# EAGLE board simple_schematic_3v (EAGLE 7.6.0)
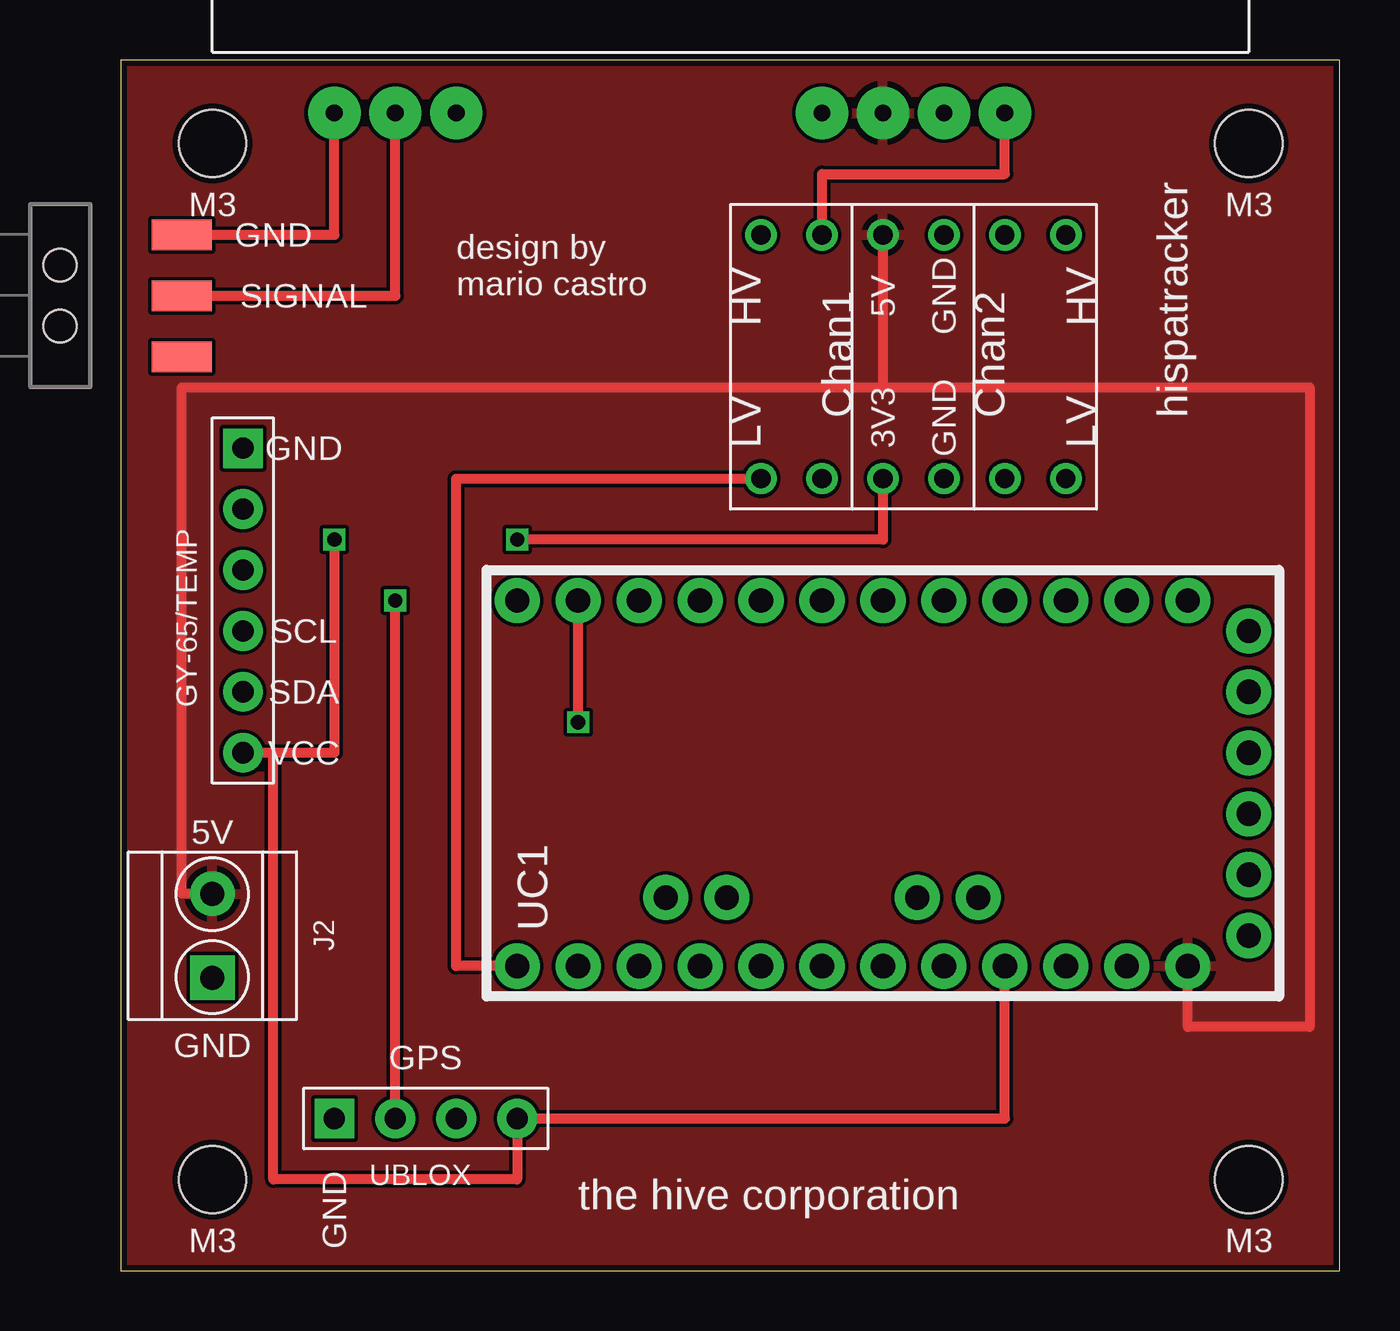
[diagram p0: board, top side]
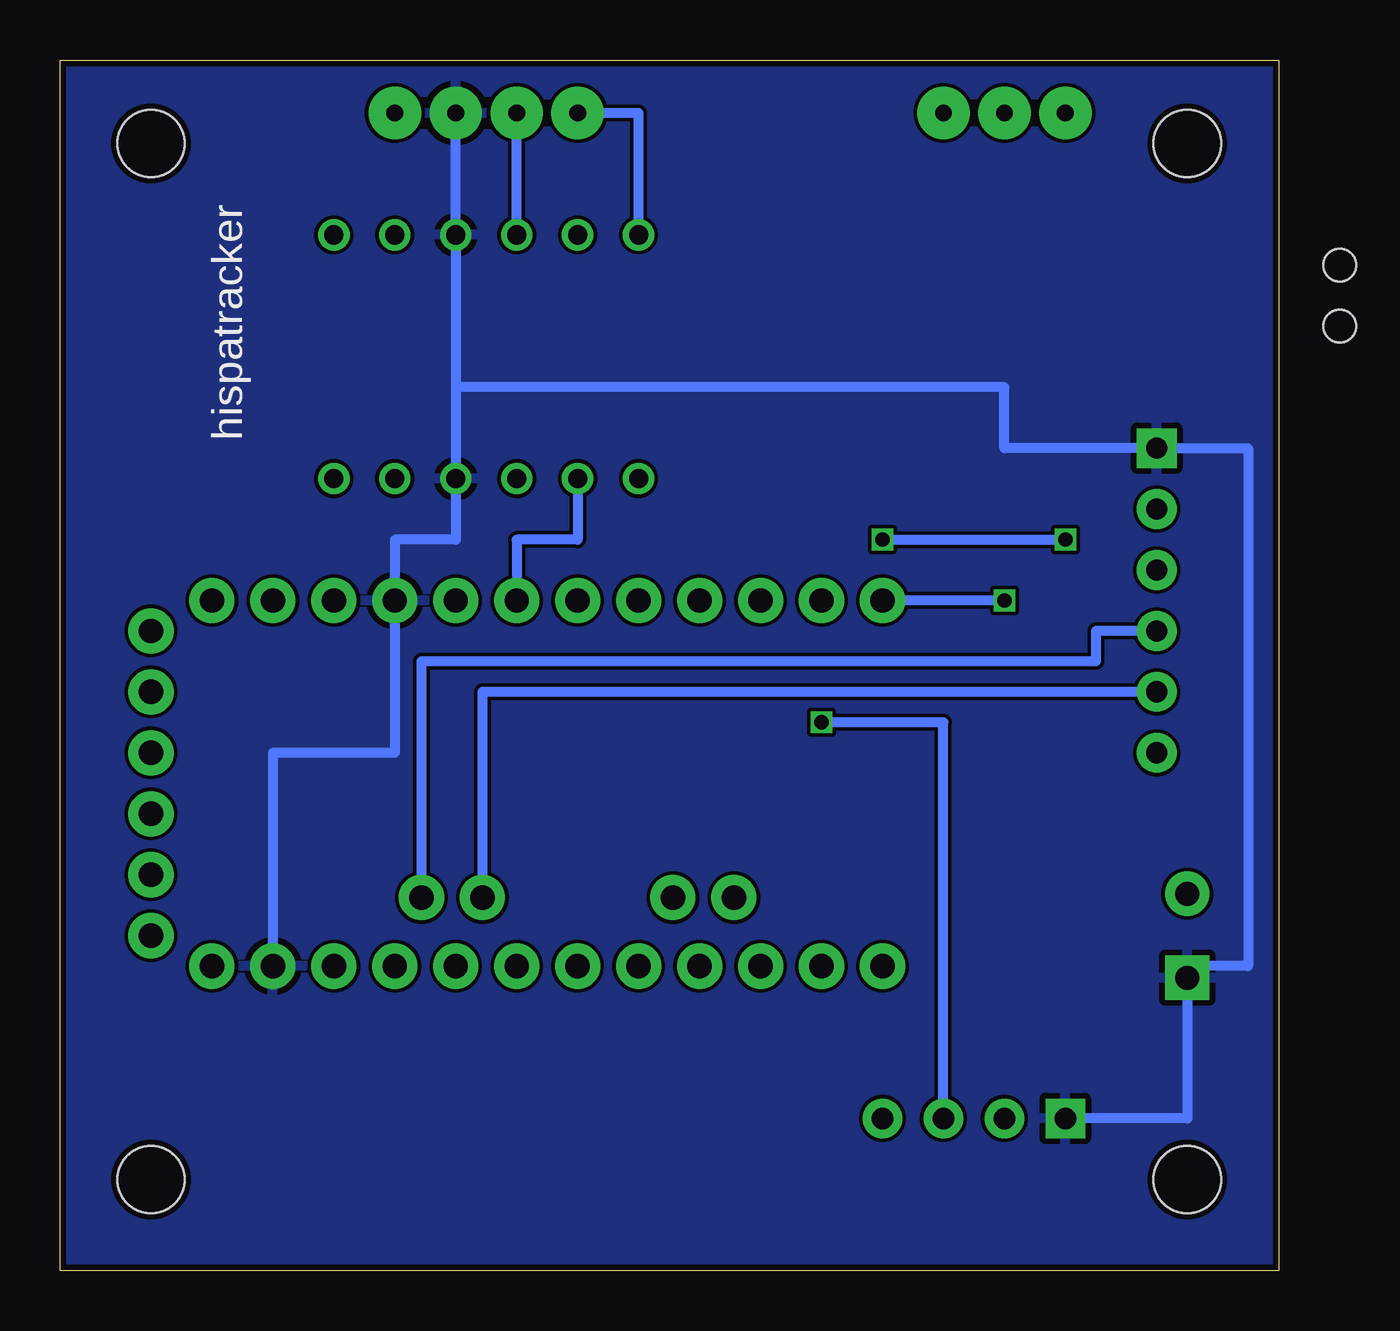
[diagram p1: board, bottom side, seen from below]

Size 50.78 x 50.47 mm. Coordinates in mm from the lower left corner, seen from the top.
Outline: 0,0 50.78,0 50.78,50.47 0,50.47 0,0
Copper layers (1*16): Top 0.035mm / dielectric 1.5mm / Bottom 0.035mm
Design rules "SeeedStudio_2layer_DRU_no_angle_20140221": minimum track width 6mil, minimum drill 12mil, track to track 6mil, track to pad 6mil, pad to pad 6mil, via to via 6mil, smd to smd 0mil, copper to edge 10mil, drill to drill 10mil, minimum pad ring 10mil, minimum via ring 6mil, stop-mask expansion 2mil, vias tented up to drill 100mil, thermal gap 10mil
Net classes: 0 default: width 0.203 mm; 1 vcc: width 0.254 mm
Holes 2.8 mm at 3.81,46.99 46.99,46.99 46.99,3.81 3.81,3.81

## Footprints (pad centres in the part's own frame; a part is rotated, then mirrored left to right if it is on the bottom)
H6-2.54 = drill 0.889 pad 1.651 square: 1 0,6.35 | drill 0.889 pad 1.651: 2 0,3.81; 3 0,1.27; 4 0,-1.27; 5 0,-3.81; 6 0,-6.35
1X03_SMD_RA_MALE_POST_SMALLER = smd 1.27 x 2.5: 1 -2.54,5.07; 2 0,5.07; 3 2.54,5.07 | hole 1.359: -1.27,0; 1.27,0
H2-3.5-7.0X7.0MM = drill 1 pad 1.85 square: 1 -1.75,0 | drill 1 pad 1.85: 2 1.75,0
RADIOMETRIX-HX1 = drill 0.7 pad 2.184: 0V 8.89,-10.16; EN 3.81,-10.16; RFGND -11.43,-10.16; RFGND2 -16.51,-10.16; RFOUT -13.97,-10.16; TXD 11.43,-10.16; VCC 6.35,-10.16
LOGIC_LEVEL_CONVERTER = drill 0.8: P$1 1.27,13.97; P$2 1.27,11.43; P$3 1.27,8.89; P$4 1.27,6.35; P$5 1.27,3.81; P$6 1.27,1.27; P$7 11.43,1.27; P$8 11.43,3.81; P$9 11.43,6.35; P$10 11.43,8.89; P$11 11.43,11.43; P$12 11.43,13.97
H4-2.54 = drill 0.889 pad 1.651 square: 1 0,3.81 | drill 0.889 pad 1.651: 2 0,1.27; 3 0,-1.27; 4 0,-3.81
ARDUINO_PRO_MINI = drill 1.016 pad 1.88: 1 -7.62,12.7; 2 -7.62,10.16; 3 -7.62,7.62; 4 -7.62,5.08; 5 -7.62,2.54; 6 -7.62,0; 7 -7.62,-2.54; 8 -7.62,-5.08; 9 -7.62,-7.62; 10 -7.62,-10.16; 11 -7.62,-12.7; 12 -7.62,-15.24; 13 7.62,-15.24; 14 7.62,-12.7; 15 7.62,-10.16; 16 7.62,-7.62; 17 7.62,-5.08; 18 7.62,-2.54; 19 7.62,0; 20 7.62,2.54; 21 7.62,5.08; 22 7.62,7.62; 23 7.62,10.16; 24 7.62,12.7; A4 4.763,1.429; A5 4.763,3.969; A6 4.763,-9.049; A7 4.763,-6.509; BLK -6.35,15.24; GND -3.81,15.24; GRN 6.35,15.24; RXI 1.27,15.24; TXO 3.81,15.24; VCC -1.27,15.24

## Placement (x,y rotation side)
GY-65/TEMP  6p-2.54  [H6-2.54]  5.08,27.94 0 top
J1  [1X03_SMD_RA_MALE_POST_SMALLER]  -2.54,40.64 270 top  (not fitted)
J2  GREEN-2P-3.5  [H2-3.5-7.0X7.0MM]  3.81,13.97 90 top
U$1  RADIOMETRIX-HX1  [RADIOMETRIX-HX1]  25.4,58.42 0 top  (not fitted)
U$2  LOGIC_LEVEL_CONVERTER  [LOGIC_LEVEL_CONVERTER]  40.64,31.75 90 top
UBLOX  4p-2.54  [H4-2.54]  12.7,6.35 90 top
UC1  ARDUINO_PRO_MINI_3V3  [ARDUINO_PRO_MINI]  31.75,20.32 270 top

## Library data of the parts
GY-65/TEMP = Seeed-Connector -2016; MPN: F185-1106A1BSYC1
J1 = SparkFun-Connectors
J2 = Seeed-Connector -2016
U$1 = Ava
U$2 UC1 = SparkFun-Boards
UBLOX = Seeed-Connector -2016; MPN: F185-1104A1BSYA1

## Nets
3V3: GY-65/TEMP.6 U$2.P$3 UBLOX.4 UC1.21
5V: J2.2 U$1.VCC U$2.P$10 UC1.24
EOC: GY-65/TEMP.2
GND: GY-65/TEMP.1 J2.1 U$1.0V U$2.P$4 U$2.P$9 UBLOX.1 UC1.4 UC1.23
HX1_EN_LOW: U$2.P$1 UC1.13
HX1_ENABLE: U$1.EN U$2.P$12
HX1_TXD: U$1.TXD U$2.P$11
HX1_TXD_LOW: U$2.P$2 UC1.6
N$1: J1.1 U$1.RFGND2
N$3: J1.2 U$1.RFOUT
SCL: GY-65/TEMP.4 UC1.A5
SDA: GY-65/TEMP.5 UC1.A4
UBLOX_RX: UBLOX.2 UC1.12
UBLOX_TX: UBLOX.3 UC1.11
XCLR: GY-65/TEMP.3

## Tracks (layer width: path | path; a pad name or v marks a point on that pad's centre or on a via)
3V3  (via drill 0.6)
  Top 0.406: 6.35,21.59 6.35,3.81 16.51,3.81 UBLOX.4 36.83,6.35 UC1.21 | 6.35,21.59 GY-65/TEMP.6 | U$2.P$3 31.75,30.48 v16.51,30.48 | v8.89,30.48 8.89,21.59 6.35,21.59
  Bottom 0.406: v16.51,30.48 v8.89,30.48
5V
  Top 0.406: J2.2 2.54,15.72 2.54,36.83 31.75,36.83 | U$2.P$10 31.75,36.83 | 31.75,36.83 49.53,36.83 49.53,10.16 44.45,10.16 UC1.24
  Bottom 0.406: U$2.P$10 U$1.VCC
  pour Top: 0,50.8 50.8,50.8 50.8,0 0,0
GND
  Bottom 0.406: U$1.0V U$2.P$9 34.29,36.83 | 34.29,36.83 11.43,36.83 11.43,34.29 GY-65/TEMP.1 1.27,34.29 1.27,12.7 3.81,12.7 J2.1 3.81,6.35 UBLOX.1 | 34.29,36.83 U$2.P$4 34.29,30.48 36.83,30.48 UC1.4 36.83,21.59 41.91,21.59 UC1.23
  pour Bottom: 0,50.8 50.8,50.8 50.8,0 0,0
HX1_EN_LOW
  Top 0.406: UC1.13 13.97,12.7 13.97,33.02 U$2.P$1
HX1_ENABLE
  Bottom 0.406: U$2.P$12 26.67,48.26 U$1.EN
HX1_TXD
  Top 0.406: U$2.P$11 29.21,45.72 36.83,45.72 U$1.TXD
HX1_TXD_LOW
  Bottom 0.406: U$2.P$2 29.21,30.48 31.75,30.48 UC1.6
N$1
  Top 0.406: J1.1 8.89,43.18 U$1.RFGND2
N$3
  Top 0.406: J1.2 11.43,40.64 U$1.RFOUT
SCL
  Bottom 0.406: GY-65/TEMP.4 7.62,26.67 7.62,25.4 35.72,25.4 UC1.A5
SDA
  Bottom 0.406: GY-65/TEMP.5 33.18,24.13 UC1.A4
UBLOX_RX  (via drill 0.6)
  Top 0.406: UBLOX.2 v11.43,27.94
  Bottom 0.406: v11.43,27.94 UC1.12
UBLOX_TX  (via drill 0.6)
  Top 0.406: v19.05,22.86 UC1.11
  Bottom 0.406: UBLOX.3 13.97,22.86 v19.05,22.86

## Text on the board
tNames: M3 | M3 | GND | SIGNAL | design by / mario castro | 5V | GND | 3V3 | GND | hispatracker | GND | SCL | SDA | VCC | 5V | GND | GPS | GND | the hive corporation | M3 | M3
bNames: hispatracker